# Altium PCB Sensor_Board_2024.PcbDoc
Units mil, origin at the board's own origin, x right, y up, seen from the top; angles counter-clockwise.
Board outline 3020 x 3000 mil, 2 copper layers (Top Layer, Bottom Layer); 73 components, 63 nets, 285 pads, 41 vias.
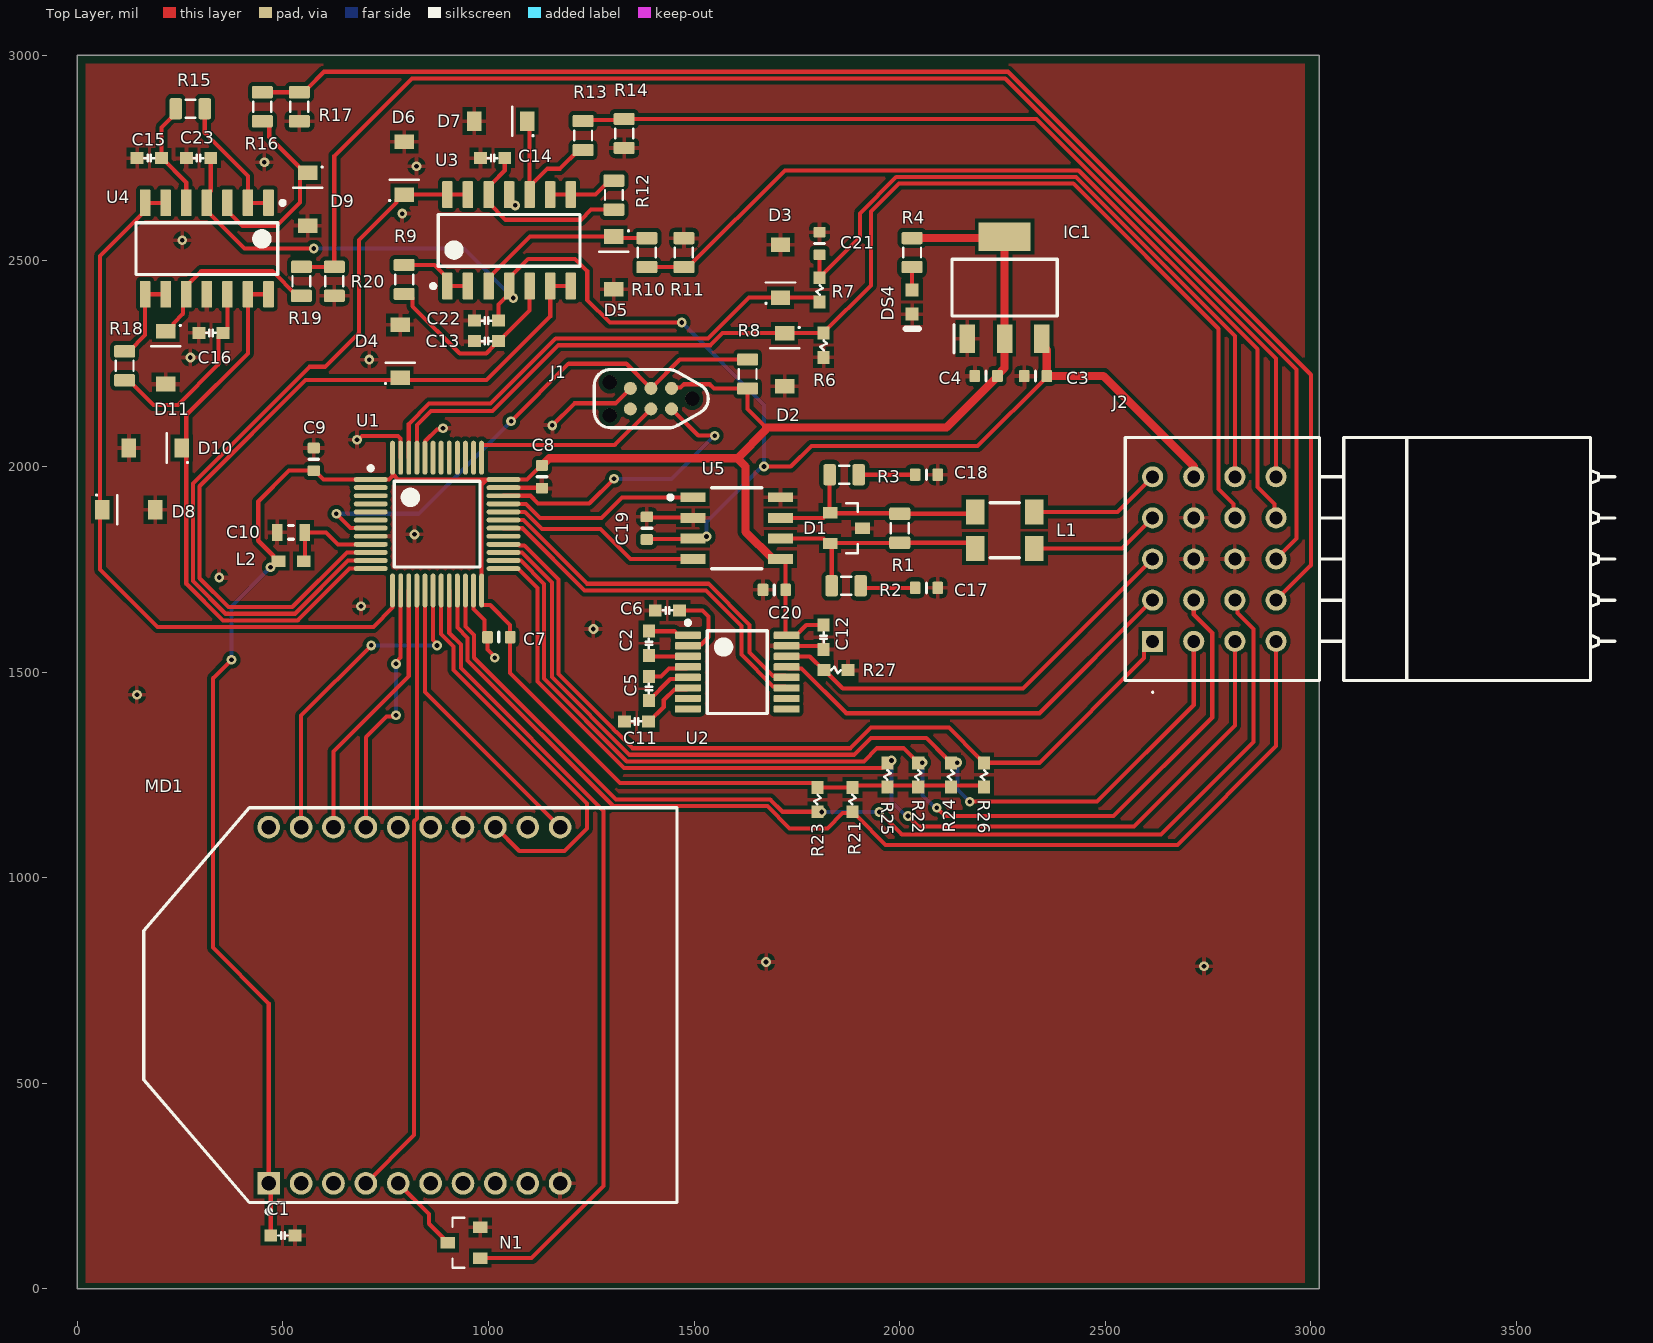
[diagram p0: Top Layer view]
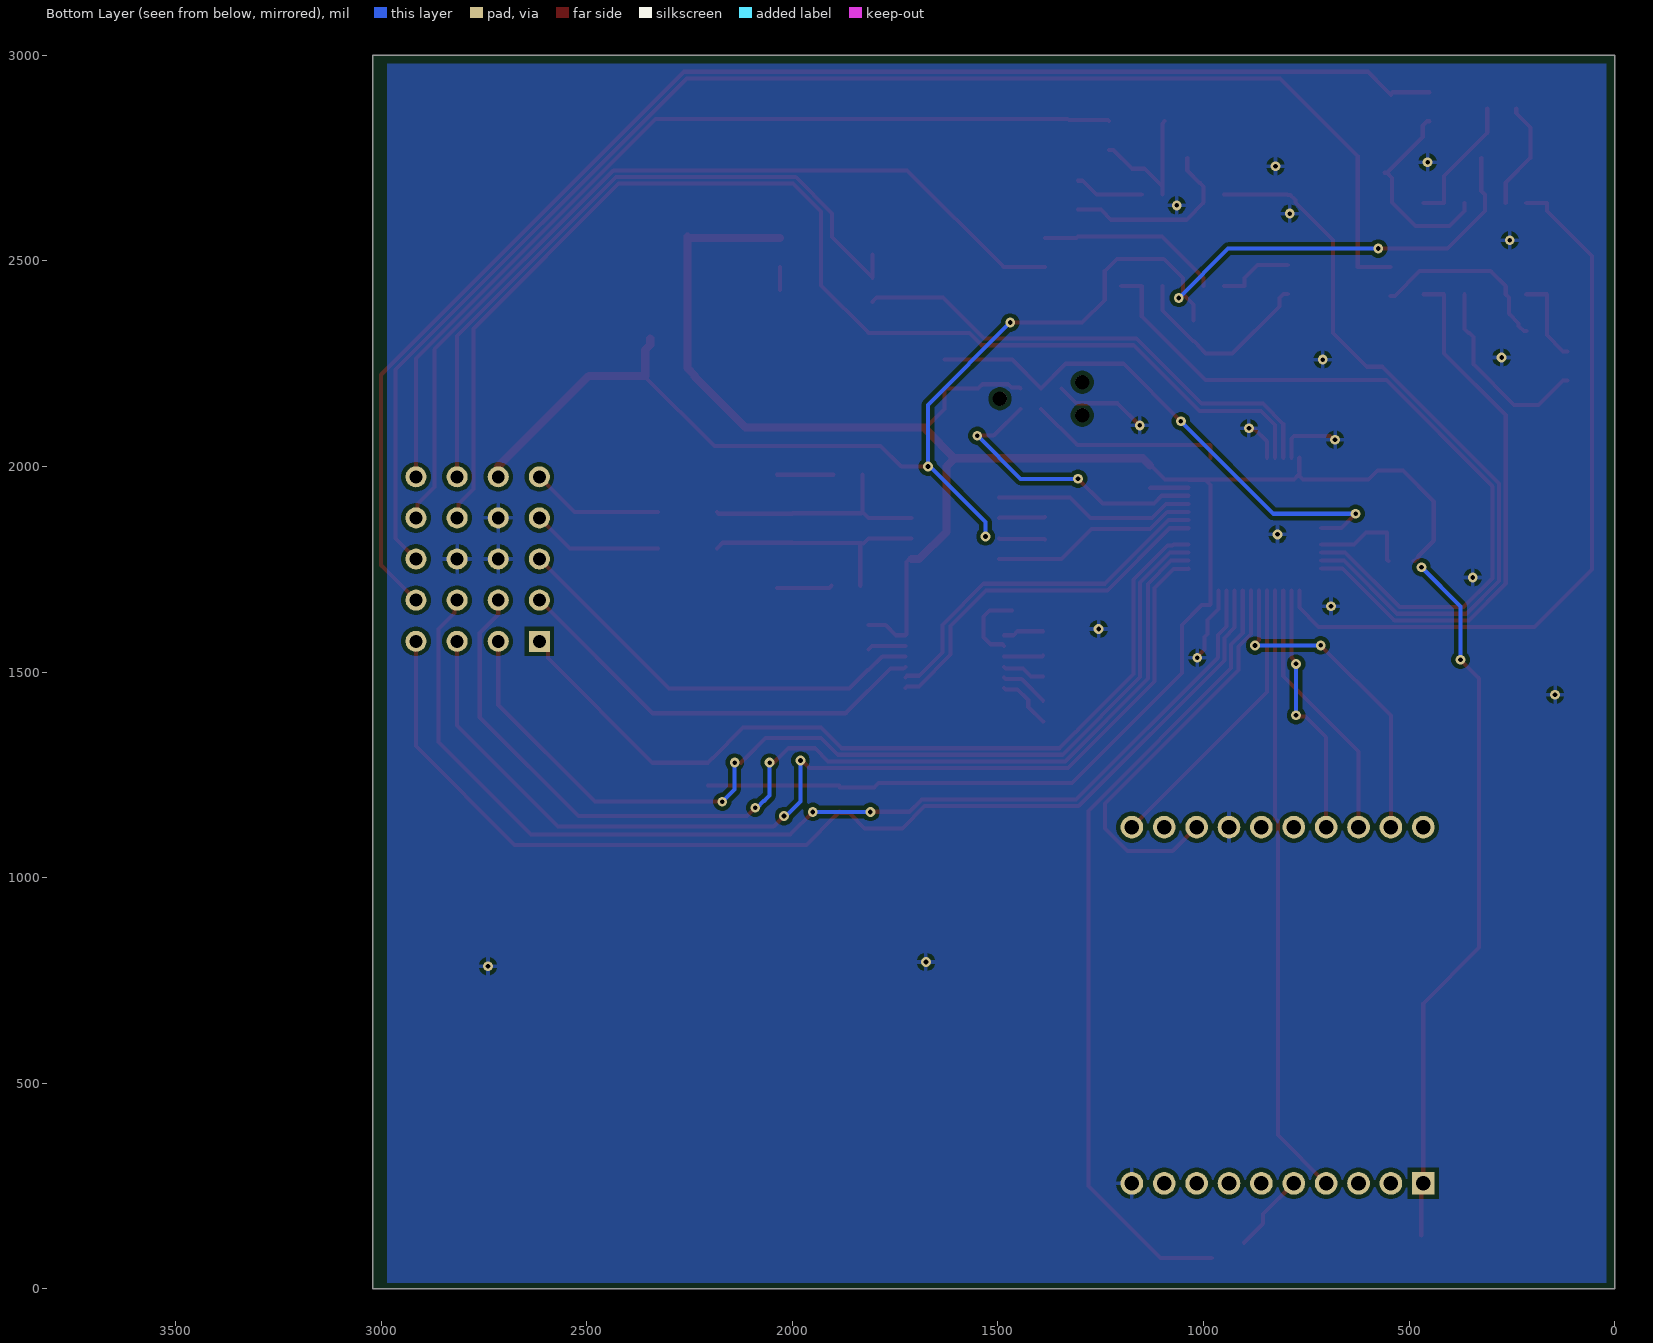
[diagram p1: Bottom Layer view, seen from below]
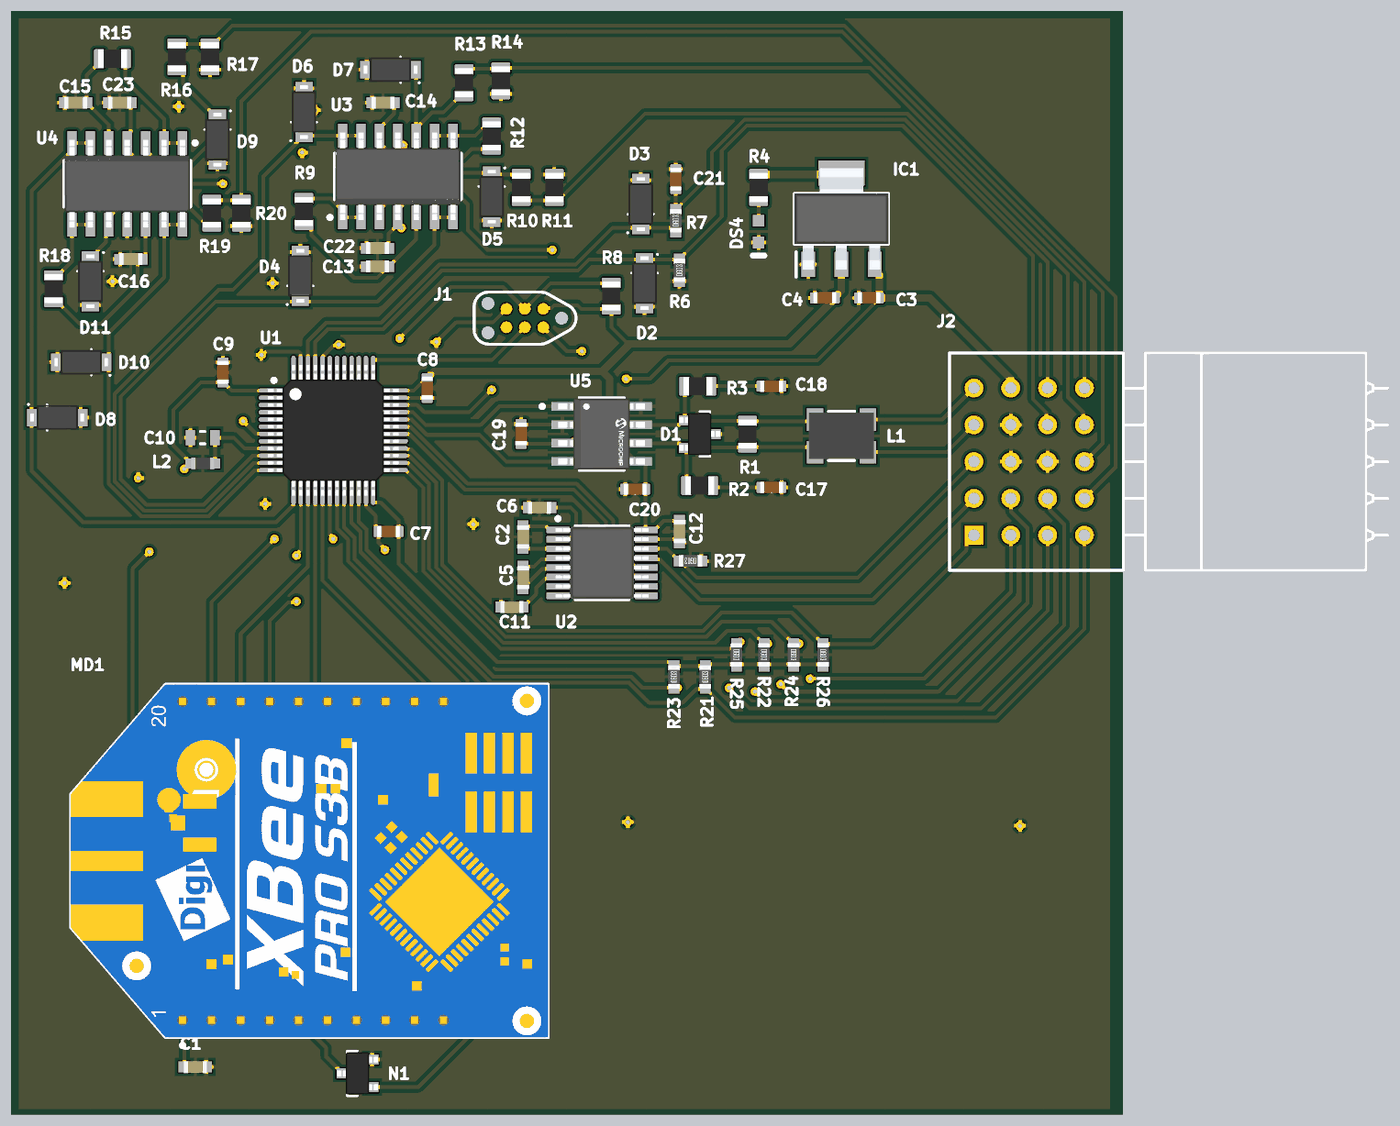
[diagram p2: 3D render of the assembled board from above, using the file's embedded part models]

## Layer stack, top to bottom
Top Solder: solder mask 0.4, Solder Resist, Dk 3.5
Top Layer: signal copper 1.4
Dielectric 1: dielectric 12.6, FR-4, Dk 4.8
Bottom Layer: signal copper 1.4
Bottom Solder: solder mask 0.4, Solder Resist, Dk 3.5

## Board outline
0,0 3020,0 3020,3000 0,3000

## Design rules (kind name [scope] priority, off if disabled: settings)
Clearance [All] p1: gap=10 ignorepadtopadclearanceinfootprint=FALSE except(0: Arc-Hole Track-Hole SMDPad-Hole THPad-Hole Via-Hole Fill-Hole Poly-Hole Region-Hole Text-Hole; 6: Arc-Arc Arc-Track Arc-SMDPad Arc-THPad Track-Track Track-SMDPad Track-THPad SMDPad-SMDPad SMDPad-THPad THPad-THPad)
PolygonConnect [All] p1: connectstyle=Relief reliefconductorwidth=10 reliefentries=4 polygonreliefangle="90 Angle" airgapwidth=10
RoutingVias [All] p1: holewidth=28 width=50 viastyle="Through Hole" minholewidth=28 minwidth=50 maxholewidth=28 maxwidth=50
SolderMaskExpansion [All] p1: expansion=4 istentingtop=FALSE
Width [All] p1: maxlimit=20 minlimit=10 preferedwidth=10 minimp=50.000000 maximp=50.000000 favimp=50.000000
30 further rules are at their usual default settings.

## Classes and differential pairs
component class XB900: C1 MD1 N1
component class Microcontroller: C3 C4 C7 C8 C9 C10 C21 D2 D3 DS4 IC1 J1 J2 L2 R4 R6 R7 R8 R21 R22 R23 R24 R25 R26 U1
component class Filters: C13 C14 C15 C16 C22 C23 D4 D5 D6 D7 D8 D9 D10 D11 R9 R10 R11 R12 R13 R14 R15 R16 R17 R18 R19 R20 U3 U4
component class Comms: C2 C5 C6 C11 C12 C17 C18 C19 C20 D1 L1 R1 R2 R3 R27 U2 U5

## Components (designator, comment, footprint, x,y, rotation, side; value= is the part's Value field where it differs from the comment)
C1 "0.1uf" CAP-0603 500,130 r180 top
C2 "0.1 uf" CAP-0603 1390,1570 r270 top
C3 "4.7u" CAPC0603(1608)100_L 2330,2220 r180 top value=1µF
C4 "2.2u" CAPC0603(1608)100_L 2210,2220 r180 top value=1µF
C5 "0.1 uf" CAP-0603 1390,1460 r270 top
C6 "0.1 uf" CAP-0603 1435,1650 r180 top
C7 "100n" CAPC0603(1608)100_L 1025,1585 r180 top value=1µF
C8 "100n" CAPC0603(1608)100_L 1130,1975 r270 top value=1µF
C9 "10n" CAPC0603(1608)100_L 575,2017.44 r90 top value=1µF
C10 "10u" CAPC1608X90X20ML10 520,1840 r0 top
C11 "0.1 uf" CAP-0603 1360,1380 r180 top
C12 "0.1 uf" CAP-0603 1815,1585 r270 top
C13 "50n" CAP-0603 995,2305 r0 top
C14 "50n" CAP-0603 1010,2750 r0 top
C15 "50n" CAP-0603 175,2750 r0 top
C16 "50n" CAP-0603 325,2325 r0 top
C17 "560p" CAPC0603(1608)100_L 2065,1705 r0 top value=1µF
C18 "560p" CAPC0603(1608)100_L 2065,1980 r0 top value=1µF
C19 "10u" CAPC0603(1608)100_L 1385,1850 r90 top value=1µF
C20 "10u" CAPC0603(1608)100_L 1695,1700 r180 top value=1µF
C21 "0.1u" CAPC0603(1608)100_L 1805,2542.44 r90 top value=1µF
C22 "1u" CAP-0603 995,2355 r0 top
C23 "1u" CAP-0603 295,2750 r0 top
D1 "DIODE-SOT23_PESD1CAN" SOT23 1870,1850 r270 top
D2 "5V" SOD123 1720,2260 r270 top
D3 "5V" SOD123 1710,2475 r90 top
D4 "5V" SOD123 785,2280 r90 top
D5 "5V" SOD123 1305,2495 r270 top
D6 "5V" SOD123 795,2725 r90 top
D7 "5V" SOD123 1030,2840 r180 top
D8 "5V" SOD123 125,1895 r0 top
D9 "5V" SOD123 560,2650 r270 top
D10 "5V" SOD123 190,2045 r180 top
D11 "5V" SOD123 215,2265 r270 top
DS4 "CMP-007-00004-1" EVRL-0603-2_V 2030,2400 r270 top
IC1 "SPX1117M3-L-3-3_TR" SOT230P700X180-4N 2255,2435 r90 top
J1 "TC2030-MCP-NL" TC2030-MCP-NL 1395,2165 r180 top
J2 "732-8254-22" 732825422 2615,1575 r90 top
L1 "744235900" WE-CNSW_1812 2255,1845 r0 top
L2 "742792693" SMD-0603 520,1770 r0 top
MD1 "XBP9B-DMUTB002" FP-XBP9B-DMUTB002-MFG 810,690 r90 top
N1 "NMOS-SOT23" SOT23 940.63,112.4 r90 top
R1 "120" RESC0805(2012)_L 2000,1850 r90 top
R2 "100" RESC0805(2012)_L 1869.96,1710 r0 top
R3 "100" RESC0805(2012)_L 1865,1980 r0 top
R4 "200" RESC0805(2012)_L 2030,2520 r270 top
R6 "40k" RES-0603 1815,2295 r90 top
R7 "40k" RES-0603 1805,2429.53 r90 top
R8 "10k" RESC0805(2012)_L 1630,2225 r90 top
R9 "10k" RESC0805(2012)_L 795,2455 r90 top value=120
R10 "100" RESC0805(2012)_L 1385,2520 r270 top value=120
R11 "715" RESC0805(2012)_L 1475,2520 r270 top value=120
R12 "10k" RESC0805(2012)_L 1305,2660 r90 top value=120
R13 "100" RESC0805(2012)_L 1230,2805 r90 top value=120
R14 "715" RESC0805(2012)_L 1330,2810 r90 top value=120
R15 "10k" RESC0805(2012)_L 275,2870 r0 top value=120
R16 "100" RESC0805(2012)_L 450,2875 r90 top value=120
R17 "715" RESC0805(2012)_L 540,2875 r90 top value=120
R18 "10k" RESC0805(2012)_L 115,2245 r90 top value=120
R19 "100" RESC0805(2012)_L 545,2450.43 r90 top value=120
R20 "715" RESC0805(2012)_L 625,2450.43 r90 top value=120
R21 "40k" RES-0603 1885,1190 r90 top
R22 "10k" RES-0603 2045,1250 r270 top
R23 "10k" RES-0603 1800,1190 r90 top
R24 "10k" RES-0603 2125,1250 r270 top
R25 "10k" RES-0603 1970,1250 r270 top
R26 "10k" RES-0603 2205,1250 r270 top
R27 "3k" RES-0603 1845,1505 r180 top
U1 "IC-LQFP48_STM32F103C8T6" STM-LQFP48_M 875,1860 r0 top
U2 "SN75C3232EPWR" PW0016A_M 1605,1500 r0 top
U3 "TL974IDR" D0014A_M 1050,2550 r90 top
U4 "TL974IDR" D0014A_M 315,2530 r270 top
U5 "MCP2562FD-H/SN" FP-C04-057-SN-MFG 1603.7,1850 r0 top

## Footprints (in the part's own frame and the unit in brackets; to place one, negate y for a bottom-side part, rotate by r counter-clockwise, add the part's x,y. Pads: shape width x height; smd on the part's side, far side on the other; paste and mask are expansions set on the pad)
732825422 [mm]
  rect 1.3x1.3 hole 0.8: 1(0,0)
  round 1.3 hole 0.8: 2(2.54,0) 3(5.08,0) 4(7.62,0) 5(10.16,0) 6(0,-2.54) 7(2.54,-2.54) 8(5.08,-2.54) 9(7.62,-2.54) 10(10.16,-2.54) 11(0,-5.08) 12(2.54,-5.08) 13(5.08,-5.08) 14(7.62,-5.08) 15(10.16,-5.08) 16(0,-7.62) 17(2.54,-7.62) 18(5.08,-7.62) 19(7.62,-7.62) 20(10.16,-7.62)
  silkscreen extent -3.2,-28.54 12.58,1.69
CAP-0603 [mm]
  rect 0.8x0.75 smd: 1(-0.75,0) 2(0.75,0)
  silkscreen extent -0.3,-0.2 0.3,0.2, body extent -0.8,-0.4 0.8,0.42, height 0.81
CAPC0603(1608)100_L [mm] "Chip Capacitor, Body 1.6x0.8mm, Height 1.0mm, IPC High Density"
  rrect25% 0.66x0.76 smd: 1(-0.7,0) 2(0.7,0)
  silkscreen extent 0,-0.3 0,0.3, body extent -0.8,-0.4 0.8,0.4, height 0.95
CAPC1608X90X20ML10 [mm] "Chip Capacitor, 2-Leads, Body 1.70x0.90mm, IPC Low Density"
  rect 0.65x1.05 smd: 1(-0.85,0) 2(0.85,0)
  silkscreen extent -0.15,-0.43 0.15,0.43, body extent -0.85,-0.45 0.85,0.45, height 0.9
D0014A_M [mm] "SOIC, 14-Leads, Body 8.75x4mm, Pitch 1.27mm, IPC Low Density"
  rrect15% 1.65x0.65 smd: 1(-2.825,3.81) 2(-2.825,2.54) 3(-2.825,1.27) 4(-2.825,0) 5(-2.825,-1.27) 6(-2.825,-2.54) 7(-2.825,-3.81) 8(2.825,-3.81) 9(2.825,-2.54) 10(2.825,-1.27) 11(2.825,0) 12(2.825,1.27) 13(2.825,2.54) 14(2.825,3.81)
  silkscreen extent -2.95,-4.38 1.6,4.81, body extent -3.02,-4.32 3.02,4.32, height 1.59
EVRL-0603-2_V [mm] "SMD, 2-Leads, Body 1.6x0.8mm"
  rect 0.8x0.8 smd: 1(-0.75,0) 2(0.75,0)
  silkscreen extent 1.65,-0.4 1.65,0.4, body extent -0.8,-0.4 0.8,0.4, height 0.5
FP-C04-057-SN-MFG [mm]
  rect 1.55x0.6 smd paste+0 mask+0: 1(-2.7,1.905) 2(-2.7,0.635) 3(-2.7,-0.635) 4(-2.7,-1.905) 5(2.7,-1.905) 6(2.7,-0.635) 7(2.7,0.635) 8(2.7,1.905)
  silkscreen extent -4.22,-2.5 1.55,2.5, body extent -3.57,-2.75 3.57,2.75, height 0.25
FP-XBP9B-DMUTB002-MFG [mm]
  rect 1.4x1.4 hole 0.9 paste-2539.97 mask+0: 1(-11,8.75)
  round 1.4 hole 0.9 paste-2539.97 mask+0: 2(-11,6.75) 3(-11,4.75) 4(-11,2.75) 5(-11,0.75) 6(-11,-1.25) 7(-11,-3.25) 8(-11,-5.25) 9(-11,-7.25) 10(-11,-9.25) 11(11,-9.25) 12(11,-7.25) 13(11,-5.25) 14(11,-3.25) 15(11,-1.25) 16(11,0.75) 17(11,2.75) 18(11,4.75) 19(11,6.75) 20(11,8.75)
  silkscreen extent -12.86,-16.47 12.19,16.47, body extent -12.29,-16.57 12.29,16.57, height 0.25
PW0016A_M [mm] "SOP, 16-Leads, Body 5.1x4.5mm, Pitch 0.65mm, IPC Low Density"
  rrect22% 1.6x0.45 smd: 1(-3.05,2.275) 2(-3.05,1.625) 3(-3.05,0.975) 4(-3.05,0.325) 5(-3.05,-0.325) 6(-3.05,-0.975) 7(-3.05,-1.625) 8(-3.05,-2.275) 9(3.05,-2.275) 10(3.05,-1.625) 11(3.05,-0.975) 12(3.05,-0.325) 13(3.05,0.325) 14(3.05,0.975) 15(3.05,1.625) 16(3.05,2.275)
  silkscreen extent -3.17,-2.55 1.85,3.17, body extent -3.21,-2.5 3.21,2.5, height 1
RES-0603 [mm]
  rect 0.8x0.75 smd: 1(-0.75,0) 2(0.75,0)
  silkscreen extent -0.3,-0.2 0.3,0.2, body extent -0.8,-0.4 0.8,0.4, height 0.44
RESC0805(2012)_L [mm] "Chip Resistor, Body 2.0x1.3mm, IPC High Density"
  rrect25% 0.76x1.3 smd: 1(-0.9,0) 2(0.89,0)
  silkscreen extent -0.3,-0.55 0.3,0.55, body extent -1,-0.62 1,0.63, height 0.6
SMD-0603 [mm] "Chip Inductor, 2-Leads, Body 1.6x0.8mm"
  rect 0.85x0.7 smd: 1(-0.775,0) 2(0.775,0)
  body extent -0.8,-0.4 0.8,0.4, height 0.79
SOD123 [mm] "SODFL, 2-Leads, Body 1.55x3.70mm, IPC Medium Density"
  rect 0.9x1.2 smd: A(1.635,0) K(-1.635,0)
  silkscreen extent -2.03,-0.9 -0.7,0.95, body extent -1.85,-0.85 1.85,0.85, height 1.3
SOT23 [mm]
  rect 0.7x0.9 smd: 1(-0.95,-1) 2(0.95,-1) 3(0,1)
  silkscreen extent -1.55,0 1.55,0.71, body extent -1.45,-1.41 1.45,1.41, height 1.5
SOT230P700X180-4N [mm]
  rect 1.75x0.95 smd: 1(-3.15,2.3) 2(-3.15,0) 3(-3.15,-2.3)
  rect 1.75x3.2 smd: 4(3.15,0)
  silkscreen extent -4.03,-3.25 1.75,3.25, body extent -3.5,-3.25 3.5,3.25, height 1.8
STM-LQFP48_M [mm] "QFP, 48-Leads, Body 7x7mm, Pitch 0.5mm, IPC Low Density"
  oval 2.1x0.3 smd: 1(-4.1,2.75) 2(-4.1,2.25) 3(-4.1,1.75) 4(-4.1,1.25) 5(-4.1,0.75) 6(-4.1,0.25) 7(-4.1,-0.25) 8(-4.1,-0.75) 9(-4.1,-1.25) 10(-4.1,-1.75) 11(-4.1,-2.25) 12(-4.1,-2.75) 25(4.1,-2.75) 26(4.1,-2.25) 27(4.1,-1.75) 28(4.1,-1.25) 29(4.1,-0.75) 30(4.1,-0.25) 31(4.1,0.25) 32(4.1,0.75) 33(4.1,1.25) 34(4.1,1.75) 35(4.1,2.25) 36(4.1,2.75)
  oval 0.3x2.1 smd: 13(-2.75,-4.1) 14(-2.25,-4.1) 15(-1.75,-4.1) 16(-1.25,-4.1) 17(-0.75,-4.1) 18(-0.25,-4.1) 19(0.25,-4.1) 20(0.75,-4.1) 21(1.25,-4.1) 22(1.75,-4.1) 23(2.25,-4.1) 24(2.75,-4.1) 37(2.75,4.1) 38(2.25,4.1) 39(1.75,4.1) 40(1.25,4.1) 41(0.75,4.1) 42(0.25,4.1) 43(-0.25,4.1) 44(-0.75,4.1) 45(-1.25,4.1) 46(-1.75,4.1) 47(-2.25,4.1) 48(-2.75,4.1)
  silkscreen extent -4.22,-2.65 2.65,3.57, body extent -4.51,-4.51 4.51,4.51, height 1.55
TC2030-MCP-NL [mm] "Conector ICD en placa"
  round 0.8 smd paste-0.4: 1(-1.27,-0.635) 2(-1.27,0.635) 3(0,-0.635) 4(0,0.635) 5(1.27,-0.635) 6(1.27,0.635)
  round 0.85 hole 0.9 unplated mask+0: ""(-2.54,0) ""(2.54,-1.016) ""(2.54,1.016)
  silkscreen extent -3.54,-1.8 3.5,1.8, body extent -3.54,-1.8 3.5,1.8
WE-CNSW_1812 [mm] "SMT Common Mode Line Filter, 4-leads, body 4.50x3.20mm"
  rect 1.15x1.55 smd: 1(-1.825,-1.125) 2(1.825,-1.125) 3(1.825,1.125) 4(-1.825,1.125)
  silkscreen extent -0.9,-1.7 0.9,1.7, body extent -2.25,-1.6 2.25,1.6, height 2.84

## Part data
C1 C2 C5 C6 C11 C12: library part CMP-009-000303-1, Design Item ID=CAP-0603, Source=ife19_Elec_Library.SchLib
C3 C4 C7 C8 C9 C17 C18 C19 C20 C21: library part CMP-005-000563-1, "Chip Capacitor, 1 uF, +/- 10%, 16 V, 0603 (1608 Metric)", Capacitor Type=Ceramic, Case/Package=0603, Max Operating Temperature=125°C, Min Operating Temperature=-55°C, Tolerance=10%, Voltage Rating=16V, Available Preview Images=2D, Design Item ID=CMP-001-00003-4, Mounting Technology=SM, Pins=2, RoHS Compliant=True, Source="Integrated_Library - 12.03.21 - 15.39.SchLib"
C10: library part CMP-2000-04979-1, "C1608X5R1A106K080AC - Chip Capacitor, 10 uF, +/- 10%, 10 V, -55 to 85 degC, 0603 (1608 Metric), RoHS, Tape and Reel", Capacitance=10µF, Manufacturer=TDK, Operating Temperature=-55degC~85degC, Package / Case=0603(1608Metric), Package Description="2-Pin Surface Mount Device, Body 1.6 x 0.8 mm", Package Reference=603, PCN Part Number=MLCCPartNumberChange30/Nov/2012, Ratings=-, Standard Package=1, Temperature Coefficient=X5R, Tolerance=±10%, Voltage - Rated=10V, Applications=GeneralPurpose, Category=Capacitors, Datasheet URL=http://download.siliconexpert.com/pdfs/2015/4/21/15/54/45/779/tdk_/manual/37024850441143360mlcc_commercial_general_en.pdf, Datasheet Version=Mar-15, Design Resources=20WNon-IsolatedBuckLEDDriverUsingPLLNK460KG, Family=CeramicCapacitors, Features=-, Height - Seated (Max)=-, Kits=445-9003-KIT-ND-KITCAPCERHICAPMLCCSMD, Lead Spacing=-, Lead Style=-, Manufacturer URL=http://www.tdk.com/, Mounting Type=SurfaceMount,MLCC, Online Catalog=CSeries,GeneralPurpose, Other Names=445-7486-1, Packaging=CutTape(CT), Product Training Modules=CSeriesGeneralApplicationsSEAT,CCV,andTVCLDesignToolsGuidetoReplacinganElectrolyticCapacitorwithanMLCC, RoHS Information=RoHSCertificate-MLCC, Series=C, Size / Dimension="0.063\"Lx0.031\"W(1.60mmx0.80mm)", Thickness (Max)="0.035\"(0.90mm)"
C13 C14 C15 C16: library part CMP-050-000071-1, Design Item ID=CAP-0603, Source=ife19_Elec_Library.SchLib
C22 C23: library part CMP-005-000671-1, Design Item ID=CAP-0603, Source=ife19_Elec_Library.SchLib
D1: library part CMP-051-000170-1, Design Item ID=DIODE-SOT23_PESD1CAN, Source=ife19_Elec_Library.SchLib
D2 D3 D4 D5 D6 D7 D8 D9 D10 D11: library part CMP-051-000177-1, Design Item ID=DIODE-SOD123, Source=ife19_Elec_Library.SchLib
DS4: library part CMP-016-000003-1, "Chip LED, Red, 5 V, 25 mA, -40 to 85 degC, 2-Pin SMD (0603), RoHS, Tape and Reel", Case/Package=0603, Colour=Red, Forward Voltage=2.2V, Manufacturer="Everlight Electronics", Package Description="2-Pin Surface Mount Device, Body 1.6 x 0.8 mm", Datasheet URL=https://datasheet.ciiva.com/4688/el-19-217-r6c-al1m2vy-3tpdf-187026-4688713.pdf, Datasheet Version="Rev. 1, 01/2005", Design Item ID=CMP-007-00004-1, Lens Style=Clear, Manufacturer URL=http://www.everlight.com/, Mounting Technology=SM, Package Reference=0603, RoHS Compliant=False, Source="Integrated_Library - 12.03.21 - 15.39.SchLib"
IC1: library part CMP-040-000003-1, "Integrated Circuit", Arrow Part Number=SPX1117M3-L-3-3/TR, Manufacturer_Name=EXAR, Mouser Part Number=701-SPX1117M3-L-33TR, Arrow Price/Stock=https://www.arrow.com/en/products/spx1117m3-l-3-3tr/exar, Datasheet Link=https://componentsearchengine.com/Datasheets/2/SPX1117M3-L-3-3_TR.pdf, Design Item ID=SPX1117M3-L-3-3_TR, Height=1.8mm, Manufacturer_Part_Number=SPX1117M3-L-3-3/TR, Mouser Price/Stock=https://www.mouser.com/Search/Refine.aspx?Keyword=701-SPX1117M3-L-33TR, Source=SamacSys.SchLib
J1: library part CMP-003-000769-1, "Conector par ICD", Design Item ID=TC2030-MCP-NL, Source="Image Pasted at 2021-10-31 17-08.SchLib"
J2: library part CMP-045-000002-1, "Rectangular Contact Inserts", Manufacturer_Name="TE Connectivity", Mouser Part Number=571-732-8254-22, Arrow Part Number=732-8254-22, Arrow Price/Stock=https://www.arrow.com/en/products/732-8254-22/deutsch-group, Datasheet Link=https://www.te.com/commerce/DocumentDelivery/DDEController?Action=showdoc&DocId=Customer+Drawing%7F732-8254-22_X_XXXXX%7FG%7Fpdf%7FEnglish%7FENG_CD_732-8254-22_X_XXXXX_G.pdf%7FZPF000000000100304, Design Item ID=732-8254-22, Height=14.2mm, Manufacturer_Part_Number=732-8254-22, Mouser Price/Stock=https://www.mouser.co.uk/ProductDetail/TE-Connectivity-DEUTSCH/732-8254-22?qs=3oHdzXquMOypmJSB%252Be7EhA%3D%3D, Source=SamacSys.SchLib
L1: library part CMP-1372-00007-2, Ambient Temperature Range High=85°C, Ambient Temperature Range Low=-40°C, Case/Package=1812, Current=2A, DC Resistance (DCR)=50mΩ, Inductance=300nH, Max Operating Temperature=125°C, Tolerance=25%, Voltage Rating=60V, Voltage Rating (AC)=50V, Core Material=Ferrite, Current Rating=2A, Depth=3.2mm, Height=2.8mm, Impedance=90Ω, Length=4.5mm, Max DC Current=2A, Min Operating Temperature=-40°C, Mount="Surface Mount", NexarPartId=24746530, Number of Lines=2, Number of Pins=4, Packaging=Digi-Reel®, REACH SVHC="No SVHC", Resistance=50mΩ, RoHS=Compliant, Termination=SMD/SMT, Voltage Rating (DC)=50V, Width=3.2mm
L2: library part CMP-0220-00111-1, "SMD EMI Suppression Ferrite Bead WE-CBF, Z = 2200 Ohm", ComponentLink1Description="Manufacturer Link", ComponentLink1URL=http://www.we-online.com, ComponentLink2Description=Datasheet, ComponentLink2URL=http://www.we-online.de/katalog/media/pdf/742792693.pdf, DatasheetVersion=Dec-2005, Impedance="2200 Ohm", PackageDescription="Chip Inductor, 2-Leads, Body 1.6 x 0.8 mm", PackageReference=SMD-0603, PackageVersion=2009
MD1: library part CMP-84319-000004-1, "RX TXRX MOD ISM < 1GHZ U.FL TH", Case/Package=Module, Current - Receiving=29mA, Current - Transmitting=215mA, Frequency=900MHz, Max Frequency=928MHz, Max Operating Temperature=85°C, Max Supply Voltage=3.6V, Min Frequency=902MHz, Min Operating Temperature=-40°C, Min Supply Voltage=2.4V, Output Power (dBm)=24dBm, Package Quantity=1, Data Rate=200Kbps, Interface=SPI, Memory Size=2KB, Number of Pins=20, Packaging=Bulk, Radiation Hardening=No, RAM Size=2KB, Sensitivity=-101dBm, Series=XBee-Pro™
N1: library part CMP-009-000184-1, Design Item ID=NMOS-SOT23, Source=ife19_Elec_Library.SchLib
R1 R2 R3 R4 R8: library part CMP-009-000172-1
R6 R7 R21 R22 R23 R24 R25 R26 R27: library part CMP-014-000032-1, Design Item ID=RES-0603, Source=ife19_Elec_Library.SchLib
R9 R10 R11 R12 R13 R14 R15 R16 R17 R18 R19 R20: library part CMP-009-000172-1, "Chip Resistor, 120 Ohms, +/-5 %, 0.1 W, -55 to 155 degC, 0603", Case/Package=0603, Max Operating Temperature=155°C, Min Operating Temperature=-55°C, Power=100mW, Tolerance=5%, Available Preview Images=2D, Design Item ID=CMP-009-00176-2, Pins=2, Source="Integrated_Library - 12.03.21 - 15.39.SchLib"
U1: library part CMP-056-001427-1, I/Os (High Current)=37, Operating Frequency(F) (Processor speed) (MHz)=72Hz, PartNumber=STM32F103C8T6, Supply Voltage(Vcc) min (V)=2, A/D Converter="2x12-bit (10 Channel)", ComponentLink1Description="Manufacturer URL", ComponentLink1URL=http://www.st.com/web/en/home.html, ComponentLink2Description=Datasheet, ComponentLink2URL=http://www.st.com/st-web-ui/static/active/en/resource/technical/document/datasheet/CD00161566.pdf, ComponentLink3Description="Package Specification", ComponentLink3URL=http://www.st.com/st-web-ui/static/active/en/resource/technical/document/datasheet/DM00058181.pdf, Core="ARM Cortex-M3", DatasheetVersion="Rev. 16", Design Item ID=IC-LQFP48_STM32F103C8T6, FLASH Size (Prog) (kB)=64, Internal RAM Size (kB)=20, Mounting Technology="Surface Mount", PackageDescription="48-Pin Low Profile Quad Flat Package, 7 x 7 mm Body, 0.5 mm Pitch", PackageReference=LQFP48, PackageVersion="Rev. 6, 06/2013", Packing=Tray, Source=ife19_Elec_Library.SchLib
U2: library part CMP-0299-01607-2, "3-V to 5.5-V Two-Channel RS-232 1-Mbit/s Line Driver / Receiver with ±15-kV IEC ESD Protection, 0 to 70 degC, 16-Pin TSSOP (PW), Green (RoHS & no Sb/Br)", Drivers Per Package=2, Supply Voltage(s)(V)="3.3 or 5.0", ComponentLink1Description="Manufacturer URL", ComponentLink1URL=www.ti.com, ComponentLink2Description=Datasheet, ComponentLink2URL=http://www.ti.com/general/docs/lit/getliterature.tsp?genericPartNumber=SN75C3232E&fileType=pdf, ComponentLink3Description="Package Specification", ComponentLink3URL=http://www.ti.com/litv/pdf/mpds361, DatasheetVersion=SLLS697A, ESD HBM(kV)=+/-15, ICC(Max)(mA)=1, IEC-61000-4-2 SUPPORT=TRUE, PackageDescription="16-Pin Plastic Thin Small Outline Package 5 x 4.4 mm Body ,0.65 mm Pitch", PackageReference=PW0016A, PackageVersion="revG, Feb-2011", Receivers Per Package=2, RS-232=TRUE, Single Supply=TRUE, SubFamily=RS-232
U3 U4: library part CMP-0015-00021-2, "Output Rail-To-Rail Very-Low-Noise Operational Amplifier, 2.7 to 12 V, -40 to 125 degC, 14-pin SOIC (D14), Green (RoHS & no Sb/Br)", Manufacturer="Texas Instruments", Rating=Catalog, Total Supply Voltage(Max)(+5V is 5, +/-5V is 10)=12, Total Supply Voltage(Min)(+5V is 5, +/-5V is 10)=2.7, CMRR(Min)(dB)=60, Code_JEDEC=MS-012, ComponentLink1Description="Manufacturer URL", ComponentLink1URL=http://www.ti.com/, ComponentLink2Description=Datasheet, ComponentLink2URL=http://www.ti.com/lit/ds/symlink/tl974.pdf, ComponentLink3Description="Package Specification", ComponentLink3URL=http://www.ti.com/lit/ml/mpds177g/mpds177g.pdf, DatasheetVersion=SLOS467G, Eco-Plan="Green (RoHS & no Sb/Br)", GBW(Typ)(MHz)=12, IIB(Max)(pA)=750000, Iq per channel(Max)(mA)=2.8, Mounting Technology="Surface Mount", Number of Channels=4, Offset Drift(Typ)(uV/C)=5, PackageDescription="14-Pin Plastic Small Outline, Body 8.65 x 3.90 mm, Pitch 1.27 mm", PackageReference=D0014A, PackageVersion="4040047-5/M, 06/2011", PartNumber=TL974IDR, Slew Rate(Typ)(V/us)=5, Sub Family="General Purpose Amplifier, Low Supply Voltage Amplifier (<=2.7V)", Vio (25C)(Max)(mV)=4
U5: library part CMP-06279-000024-1, "IC TRANSCEIVER 1/1 8SOIC", Case/Package=SOIC, Max Operating Temperature=150°C, Max Supply Voltage=5.5V, Min Operating Temperature=-40°C, Min Supply Voltage=4.5V, Operating Supply Current=70mA, Package Quantity=100, Data Rate=8Mbps, Mount="Surface Mount", Number of Pins=8, Number of Transceivers=1, Packaging=Rail/Tube, Receiver Hysteresis=200mV, RoHS Compliant=Yes, Series=-, Weight=0.019048oz

## Via types
v1: diameter 23.8, hole 11.4, Top Layer to Bottom Layer, 41 vias

## Nets (pads, with @x,y where several pads share a name; then routed paths per layer and width w, separated by ;. In a path a pad name is that pad's centre, name@x,y a point inside that pad or via, vN(x,y) a via of type N, cw(c..) or ccw(c..) an arc to the next point about the centre after c; other vN are vias at no path point)
+3V3: C1.2 C4.1 C7.1 C8.1 C9.1 C12.1 C20.1 IC1.2 IC1.4 J1.1 L2.1 MD1.1 R4.1 R8.1 R21.2 R22.2 R23.2 R24.2 R25.2 R26.2 U1.1 U1.24 U1.36 U1.48 U2.16 U5.5 | length 7185.7
  Top Layer w10: v1@370,1525 330,1485 330,830 465.51,694.49 MD1.1 470.47,251.97 C1.2 ; L2.1 486.54,1770 477.76,1778.78 477.76,1781.73 440,1819.49 440,1915 514.88,1989.88 C9.1 576.96,1989.88 598.57,1968.27 U1.1 713.74,1968.42 758.42,1968.42 766.73,1976.73 U1.48 ; U1.48@767.08,1981.41 780.23,1968.27 U1.36@996.41,1968.27 ; U1.48@767.08,1987.94 U1.48@767.08,2021.07 ; C8.1 1128.04,2002.56 1093.75,1968.27 U1.36 1036.07,1967.92 996.41,1967.92 983.27,1954.77 U1.24 983.27,1664.18 984.1,1663.35 1004.17,1663.35 1052.56,1614.96 C7.1 1052.56,1497.44 1320,1230 1790.24,1230 1800,1220.24 R23.2 R21.2 ; J1.1 1446.74,2191.74 1466.74,2191.74 1475,2200 1537.9,2200 1548.33,2189.57 R8.1 1630,2140 1675,2095 ; U5.5 1715.75,1775 1722.56,1768.19 C20.1 1722.56,1592.09 U2.16 1747.72,1589.57 1772.68,1614.53 C12.1 ; R21.2@1885,1224.53 2045,1224.53 R26.2@2205,1224.53
  Top Layer w20: C8.1 1147.44,2020 1605,2020 ; 1675,2090 1605,2020 ; 1675,2095 2113.54,2095 C4.1@2237.56,2219.02 ; U5.5 1691.3,1775 1625,1841.3 1625,2000 1605,2020 ; R4.1 2251.42,2555.43 IC1.4 IC1.2 2255,2239.4 2237.56,2221.96 C4.1
  Bottom Layer w10: v1(375,1530) 375,1660 v1(470,1755)
+5: C3.1 C19.1 C22.2 C23.2 IC1.3 J2.10 U3.4 U4.4 U5.3 | length 3752.2
  Top Layer w10: C23.2 324.53,2670.43 315,2660.91 U4.4 315,2621.54 406.54,2530 v1(575,2530) ; C22.2 1024.53,2393.62 1050,2419.09 U3.4 1050,2458.46 1096.54,2505 1210,2505 1240,2475 1240,2405 1295,2350 v1(1470,2350) ; C19.1 1386.28,1823.72 1496.12,1823.72 U5.3 ; v1(1670,2000) 1735,2000 1785,2050 2189.52,2050 2357.56,2218.04 C3.1
  Top Layer w20: IC1.3 2345.55,2295.24 2357.56,2283.23 C3.1 2495,2220 2715,2000 J2.10
  Bottom Layer w10: v1(575,2530) 940,2530 v1(1060,2410) ; v1(1470,2350) 1670,2150 v1@1670,2005 ; v1(1530,1830) 1530,1865 v1@1670,2005 ; v1(1670,2000) v1@1670,2005
AUX_1: J2.12 R23.1 U1.22 | length 2692.1
  Top Layer w10: U1.22 943.9,1611.1 965,1590 965,1535 1310,1190 1685,1190 1714.53,1160.47 R23.1 ; v1(1950,1160) 2005,1105 2635,1105 2860,1330 2860,1605 2821.2,1643.8 2821.2,1668.8 J2.12
  Bottom Layer w10: v1(1810,1160) v1(1950,1160)
AUX_2: J2.11 R25.1 U1.25 | length 2539.5
  Top Layer w10: U1.25 1037.01,1751.14 1072.44,1751.14 1119,1704.58 1119,1477.52 1329.52,1267 1957.47,1267 1959.25,1268.78 1960.24,1268.78 1970,1278.54 R25.1 ; v1(2020,1150) 2045,1125 2570,1125 2815,1370 J2.11
  Bottom Layer w10: v1(1980,1285) 1980,1185 2015,1150 v1(2020,1150)
AUX_3: J2.7 R22.1 U1.26 | length 2583.3
  Top Layer w10: U1.26 1036.76,1771.07 1078.67,1771.07 1135,1714.75 1135,1484.15 1336.15,1283 1913,1283 1945,1315 2009.53,1315 2034.25,1290.28 2035.24,1290.28 2045,1280.51 R22.1 ; v1(2090,1170) 2110,1150 2520,1150 2760,1390 2760,1595 2715,1640 J2.7
  Bottom Layer w10: v1(2055,1280) 2055,1200 2068.22,1186.78 2069.48,1186.78 2086.27,1170 v1(2090,1170)
AUX_4: J2.6 R24.1 U1.27 | length 2367.8
  Top Layer w10: U1.27 1036.76,1790.76 1081.62,1790.76 1154,1718.37 1154,1487.78 1342.78,1299 1889,1299 1930,1340 2064.53,1340 2114.25,1290.28 2115.24,1290.28 2125,1280.51 R24.1 ; v1(2170,1185) 2480,1185 2715,1420 J2.6
  Bottom Layer w10: v1(2140,1280) 2140,1215 v1@2165,1190
AUX_5: J2.1 R26.1 U1.28 | length 2109.8
  Top Layer w10: U1.28 1072.34,1810.79 1075.12,1808.01 1086.99,1808.01 1170,1725 1170,1495 1303.72,1361.28 1303.72,1360.68 1310.17,1354.24 1310.76,1354.24 1350,1315 1880,1315 1930,1365 2119.53,1365 2194.25,1290.28 2195.24,1290.28 2205,1280.51 R26.1 2339.53,1279.53 2594.41,1534.41 2594.41,1554.41 J2.1
CAN_RX: U1.32 U5.4 | length 508.4
  Top Layer w10: U1.32 1036.76,1889.18 1088.19,1889.18 1129.64,1847.73 1272.27,1847.73 1345,1775 U5.4
CAN_TX: U1.33 U5.1 | length 495.9
  Top Layer w10: U1.33 1090.79,1909.21 1125,1875 1275,1875 1325,1925 U5.1
CANH: J2.5 L1.3 | length 323.7
  Top Layer w10: L1.3 2529.29,1889.29 J2.5
CANL: J2.4 L1.2 | length 318.9
  Top Layer w10: L1.2 2540.71,1800.71 J2.4
GND: C1.1 C3.2 C4.2 C6.2 C7.2 C8.2 C9.2 C10.1 C11.2 C12.2 C13.1 C14.1 C15.1 C16.1 C17.2 C18.2 C19.2 C20.2 C21.2 C22.1 C23.1 D1.3 D2.A D3.A D4.A D5.A D6.A D7.A D8.A D9.A D10.A D11.A DS4.2 IC1.1 J1.5 J2.8 J2.9 J2.13 MD1.10 MD1.14 N1.2 R6.1 R11.1 R14.1 R17.1 R20.1 R27.1 U1.8 U1.23 U1.35 U1.44 U1.47 U2.15 U3.11 U4.11 U5.2 U5.8 | length 968.8
  Top Layer w10: v1(680,2065) 683.73,2065 692.49,2073.76 780.21,2073.76 786.07,2067.9 786.07,2021.76 U1.47 ; U1.44 845.82,2021.76 845.82,2061.42 874.83,2090.43 886.89,2090.43 v1(889.53,2093.07) ; U1.23 963.58,1653.31 990,1626.89 990,1592.44 C7.2 997.44,1555.04 1015,1537.48 v1(1015,1535) ; U1.35 1036.76,1948.24 1129.2,1948.24 C8.2 ; v1(1155,2100) 1208.72,2153.72 1308.72,2153.72 J1.5 ; C19.2 1386.28,1876.28 1496.12,1876.28 U5.2 ; U2.15 1806.5,1563.98 C12.2
  other v1: 2740,785 1675,795 145,1445 1255,1605 690,1660 345,1730 820,1835 710,2260 275,2265 255,2550 790,2615 1065,2635 825,2730 455,2740
GPS_RESTORE: J2.16 R21.1 U1.21 | length 2720.7
  Top Layer w10: U1.21 924.21,1608.16 949,1583.37 949,1528.37 1303.37,1174 1678.37,1174 1732.37,1120 1824.02,1120 1861.09,1157.08 1881.61,1157.08 R21.1 1885,1159.49 1894.76,1149.72 1895.75,1149.72 1965.47,1080 2675,1080 2915,1320 J2.16
GPS_RX: J2.2 U2.13 | length 1050.6
  Top Layer w10: U2.13 1728.94,1508.94 1761.06,1508.94 1870,1400 2340,1400 J2.2
GPS_SYNC_IN: D2.K J2.14 R6.2 U1.45 | length 3000.3
  Top Layer w10: U1.45 825.79,2100.79 860,2135 1010,2135 1170,2295 1540,2295 1569.37,2324.37 D2.K 1720.16,2324.53 R6.2 1815,2325.51 1930,2440.51 1930,2620 1998,2688 2422,2688 2775,2335 2775,1945 2811.3,1908.7 2811.3,1878.7 J2.14
GPS_SYNC_OUT: D3.K R7.1 U1.46 | length 1213.2
  Top Layer w10: U1.46 806.1,2103.73 855.29,2152.92 1005.29,2152.92 1163.37,2311 1533.37,2311 1633,2410.63 D3.K 1795.24,2410.63 1805,2400.87 R7.1
GPS_TX: J2.3 R27.2 U2.14 | length 1052.9
  Top Layer w10: U2.14 1781.1,1538.39 1814.49,1505 R27.2 1816.46,1505 1861.46,1460 2300,1460 J2.3
LIN_POT_1: J2.17 R16.2 R17.2 | length 3457.8
  Top Layer w10: R16.2 R17.2 ; R17.2@544.45,2903.86 560.59,2920 560.59,2920.8 599.79,2960 2263.14,2960 3000,2223.14 3000,1760 J2.17
LIN_POT_2: J2.18 R19.2 R20.2 | length 3542.5
  Top Layer w10: R19.2 R20.2 625,2755 814,2944 2256.51,2944 2965,2235.51 2965,1825 J2.18
LP_1: D8.K U1.13 U4.6 U4.7 | length 1817.7
  Top Layer w10: U4.6 U4.7 165,2621.54 55,2511.54 55,1900 55,1750 195,1610 720,1610 766.73,1656.73 U1.13
LP_2: D10.K U1.12 U4.13 U4.14 | length 1353.4
  Top Layer w10: U4.14 U4.13 415,2275 265,2125 265,1715 354,1626 536,1626 661.73,1751.73 U1.12
NetC2_1: C2.1 U2.1 | length 99
  Top Layer w10: C2.1 1452.32,1599.53 1462.28,1589.57 U2.1
NetC2_2: C2.2 U2.3 | length 95.8
  Top Layer w10: C2.2 1392.09,1538.39 U2.3
NetC5_1: C5.1 U2.4 | length 104.6
  Top Layer w10: C5.1 1419.76,1489.53 1439.17,1508.94 1481.06,1508.94 U2.4
NetC5_2: C5.2 U2.5 | length 119
  Top Layer w10: C5.2 1390,1431.46 1441.89,1483.35 1481.06,1483.35 U2.5
NetC6_1: C6.1 U2.2 | length 184.6
  Top Layer w10: C6.1@1465.51,1650 1520,1650 1535,1635 1535,1584.88 1517.96,1567.83 1488.78,1567.83 U2.2
NetC10_2: C10.2 L2.2 U1.9 | length 243.4
  Top Layer w10: L2.2 553.46,1772.95 C10.2 604.85,1840 634.07,1810.79 U1.9
NetC11_1: C11.1 U2.6 | length 138.8
  Top Layer w10: C11.1 1390.51,1380 1426.08,1415.57 1426.08,1431.95 1451.88,1457.76 1481.06,1457.76 U2.6
NetC13_2: C13.2 R9.1 U3.5 | length 479.7
  Top Layer w10: R9.1 805.43,2419.57 815.39,2409.61 815.39,2389.61 930,2275 994.53,2275 1013.78,2294.25 1013.78,2295.24 1023.54,2305 1025.51,2305 1100,2379.49 U3.5
NetC14_2: C14.2 R12.1 U3.12 | length 457.3
  Top Layer w10: C14.2 1039.53,2720.24 1007.99,2688.7 1007.8,2688.7 1000,2680.91 U3.12 1000,2641.54 1041.54,2600 1225,2600 1249.57,2624.57 R12.1
NetC15_2: C15.2 R15.1 U4.5 | length 268.9
  Top Layer w10: R15.1 239.57,2859.37 204.53,2824.33 C15.2 205.51,2750 265,2690.51 U4.5
NetC16_2: C16.2 R18.1 U4.12 | length 474.2
  Top Layer w10: R18.1 125.63,2209.57 185.2,2150 245,2150 343.78,2248.78 343.78,2315.24 353.54,2325 C16.2 355.24,2325 365,2334.76 U4.12
NetC17_1: C17.1 R2.2 | length 134.5
  Top Layer w10: R2.2 1910,1705 C17.1
NetC18_1: C18.1 R3.2 | length 137.4
  Top Layer w10: R3.2 C18.1
NetC21_1: C21.1 J2.15 R7.2 | length 1703.3
  Top Layer w10: R7.2 R7.2@1805,2460.04 ; C21.1 R7.2@1805,2460.04 ; J2.15 2815,2317.63 2428.63,2704 1991.37,2704 1903.07,2615.7 1903.07,2558.11 R7.2@1805,2460.04
NetD1_1: D1.1 L1.4 R1.2 R3.1 U5.7 | length 574.1
  Top Layer w10: U5.7 1814.29,1875 1826.69,1887.4 D1.1 ; R3.1 1829.57,1888.46 D1.1 ; L1.4 2178.9,1885.04 R1.2 1998.82,1886.22 1831.81,1886.22 D1.1
NetD1_2: D1.2 L1.1 R1.1 R2.1 U5.6 | length 589.1
  Top Layer w10: U5.6 1814.29,1825 1826.69,1812.6 D1.2 ; R2.1 1834.53,1808.7 D1.2 ; L1.1 2169.29,1814.57 R1.1 1999.02,1813.58 1831.61,1813.58 D1.2
NetD5_K: D5.K R10.1 U3.3 | length 448.1
  Top Layer w10: U3.3 1000,2458.46 1100.91,2559.37 D5.K 1308.94,2555.43 R10.1
NetD7_K: D7.K R13.1 U3.10 | length 347.8
  Top Layer w10: D7.K 1100,2834.37 U3.10@1100,2680.91 ; U3.10 U3.10@1100,2680.91 ; R13.1 1219.37,2769.57 1173.96,2724.15 1143.25,2724.15 U3.10@1100,2680.91
NetD9_K: D9.K R16.1 U4.3 | length 490.6
  Top Layer w10: U4.3 365,2621.54 401.54,2585 484.14,2585 541.38,2642.24 541.38,2701.65 D9.K@554.09,2714.37 ; R16.1 456.89,2839.57 466.85,2829.61 466.85,2801.61 D9.K@554.09,2714.37 ; D9.K D9.K@554.09,2714.37
NetD11_K: D11.K R19.1 U4.10 | length 453.3
  Top Layer w10: D11.K 220.91,2329.37 233.62,2342.09 233.62,2347.99 257.2,2371.57 257.2,2410.98 U4.10 265,2438.46 301.54,2475 474.37,2475 534.37,2415 R19.1
NetDS4_1: DS4.1 R4.2 | length 55.4
  Top Layer w10: DS4.1 R4.2
NetMD1_5: MD1.5 N1.3 | length 194.6
  Top Layer w10: MD1.5 855,182.4 855,158.66 N1.3
NetR9_2: R9.2 U3.1 U3.2 | length 187.8
  Top Layer w10: R9.2 868.43,2490.04 900,2458.46 U3.1 U3.2
NetR12_2: R12.2 U3.8 U3.9 | length 169
  Top Layer w10: U3.9 U3.8 1260.55,2661.22 1294.37,2695.04 R12.2
NetR15_2: R15.2 U4.1 U4.2 | length 322.3
  Top Layer w10: R15.2 310.04,2811.54 415,2706.57 U4.2 U4.1
NetR18_2: R18.2 U4.8 U4.9 | length 215.7
  Top Layer w10: R18.2 125.63,2280.04 165,2319.41 U4.8 U4.9
OIL_1: D4.K U1.10 U3.6 U3.7 | length 1872.4
  Top Layer w10: U1.10 655.85,1791.1 522.75,1658 367.25,1658 297,1728.25 297,1952 555,2210 785,2210 995,2210 1150,2365 U3.6 U3.7
OIL_2: D6.K U1.11 U3.13 U3.14 | length 1851.8
  Top Layer w10: U1.11 713.24,1771.07 658.44,1771.07 529.37,1642 360.63,1642 281,1721.63 281,1958.63 564.87,2242.5 602.5,2242.5 685,2325 685,2550.63 776.38,2642.01 776.38,2647.91 789.09,2660.63 D6.K 795.59,2661.22 U3.14 U3.13
OIL_TEMP_1: J2.19 R10.2 R11.2 | length 2191.3
  Top Layer w10: R10.2 1485.63,2484.96 1720.67,2720 2435.25,2720 2870,2285.25 2870,1950 2911.3,1908.7 2911.3,1878.7 J2.19
OIL_TEMP_2: J2.20 R13.2 R14.2 | length 2216.1
  Top Layer w10: R13.2 1232.5,2842.54 1327.5,2842.54 R14.2 2332.84,2845.04 2915,2262.88 J2.20
RST_TC: J1.3 R8.2 U1.7 | length 1303.1
  Top Layer w10: v1(630,1885) 664.5,1850.5 713.24,1850.5 U1.7 ; v1(1055,2110) 1195,2250 1335,2250 J1.3 1465.04,2260.04 R8.2
  Bottom Layer w10: v1(630,1885) 830,1885 v1(1055,2110)
STM_RX: U1.31 U2.12 | length 886.3
  Top Layer w10: U1.31 1036.76,1869.5 1085.25,1869.5 1239.75,1715 1535,1715 1635,1615 1635,1548.1 1692.04,1491.06 1721.22,1491.06 U2.12
STM_TX: U1.30 U2.11 | length 890.5
  Top Layer w10: U1.30 1036.76,1849.81 1082.31,1849.81 1233.43,1698.69 1528.69,1698.69 1615,1612.37 1615,1542.51 1692.04,1465.47 1721.22,1465.47 U2.11
SWCLK_TC: J1.4 U1.37 | length 478.2
  Top Layer w10: U1.37 983.27,2051.01 984.1,2051.85 1306.85,2051.85 J1.4
SWDIO_TC: J1.2 U1.34 | length 721.7
  Top Layer w10: U1.34 1101.89,1928.9 1120.79,1910 1245,1910 v1(1305,1970) ; J1.2 1510,2075 v1(1550,2075)
  Bottom Layer w10: v1(1305,1970) 1445,1970 v1(1550,2075)
XB_INDICATE: MD1.13 U1.19 | length 995.4
  Top Layer w10: U1.19 884.84,1592.53 915,1562.37 915,1505 1239.51,1180.49 1239.51,1119.51 1185,1065 1074.76,1065 MD1.13
XB_RESET: N1.1 U1.20 | length 1976.6
  Top Layer w10: U1.20 904.53,1595.47 933,1567 933,1509.63 1280,1162.63 1280,250 1105,75 N1.1
XB_SPI_ATTN: MD1.19 U1.18 | length 810.3
  Top Layer w10: MD1.19 544.25,1394.25 v1(715,1565) ; U1.18 865.16,1577.91 874.67,1568.4 v1(874.67,1564.67)
  Bottom Layer w10: v1(715,1565) 715.17,1564.83 874.5,1564.83 v1(874.67,1564.67)
XB_SPI_CLK: MD1.18 U1.15 | length 651.4
  Top Layer w10: MD1.18 622.99,1307.41 806.1,1490.52 U1.15
XB_SPI_CS: MD1.17 U1.14 | length 622.3
  Top Layer w10: MD1.17 701.73,1341.73 752.36,1392.36 772.36,1392.36 v1(775,1395) ; v1(775,1520) 775,1523.73 786.42,1535.15 U1.14
  Bottom Layer w10: v1(775,1395) v1(775,1520)
XB_SPI_MISO: MD1.4 U1.16 | length 1493
  Top Layer w10: MD1.4 819.03,374.23 819.03,1137.42 825.79,1144.18 U1.16
XB_SPI_MOSI: MD1.11 U1.17 | length 711.7
  Top Layer w10: U1.17 845.47,1451.77 MD1.11
pads on no net: J1. J1.6 MD1.2 MD1.3 MD1.6 MD1.7 MD1.8 MD1.9 MD1.12 MD1.15 MD1.16 MD1.20 U1.2 U1.3 U1.4 U1.5 U1.6 U1.29 U1.38 U1.39 U1.40 U1.41 U1.42 U1.43 U2.7 U2.8 U2.9 U2.10

## Polygon pours and split planes (outlines as drawn)
GND on Bottom Layer "GND_L02_P002" (solid, pour order 2): 20,2980 2985,2980 2985,15 20,15
GND on Top Layer "GND_L01_P000" (solid, pour order 0): 20,2980 2985,2980 2985,15 20,15